# Altium PCB PCB3_factory.PcbDoc (part 2 of 3)
Units mil, origin at the board's own origin, x right, y up, seen from the top; angles counter-clockwise.
Board outline 1614.17 x 4094.49 mil, 2 copper layers (Top Layer, Bottom Layer); 17 components, 26 nets, 94 pads, 20 vias.
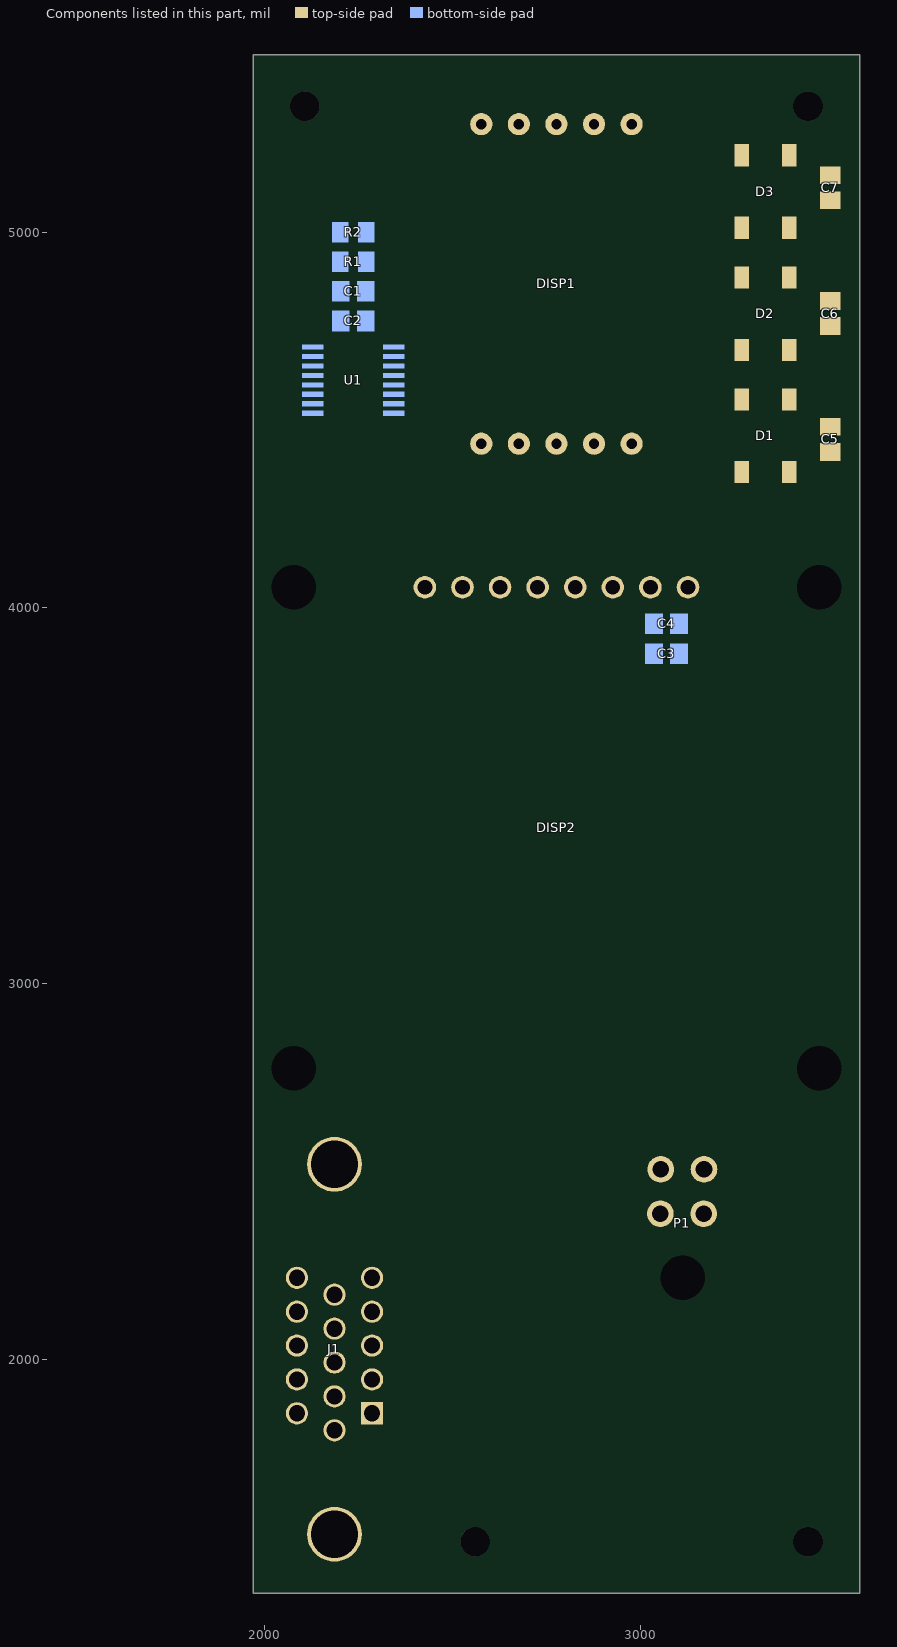
[diagram p2: the components of this part, seen from the top]

## Via types
v1: diameter 35.43/35.43 (per signal layer), hole 11.81, Top Layer to Bottom Layer, tented both sides, 20 vias

## Nets (pads, with @x,y where several pads share a name; then routed paths per layer and width w, separated by ;. In a path a pad name is that pad's centre, name@x,y a point inside that pad or via, vN(x,y) a via of type N, cw(c..) or ccw(c..) an arc to the next point about the centre after c; other vN are vias at no path point) (continued)
copper on no net: (continued)
  Bottom Layer w1: 2719.91,1595.95 3340.91,1595.95 ; 2719.91,1596.95 3340.91,1596.95 ; 2719.91,1597.95 3340.91,1597.95 ; 2719.91,1598.95 3340.91,1598.95 ; 2719.91,1599.95 3340.91,1599.95 ; 2719.91,1600.95 3340.91,1600.95 ; 2719.91,1601.95 3340.91,1601.95 ; 2719.91,1602.95 3340.91,1602.95 ; 2719.91,1603.95 3340.91,1603.95 ; 2719.91,1604.95 3340.91,1604.95 ; 2719.91,1605.95 3340.91,1605.95 ; 2719.91,1606.95 3340.91,1606.95 ; 2719.91,1607.95 3340.91,1607.95 ; 2719.91,1608.95 3340.91,1608.95 ; 2719.91,1609.95 3340.91,1609.95 ; 2719.91,1610.95 3340.91,1610.95 ; 2719.91,1611.95 3340.91,1611.95 ; 2719.91,1612.95 3340.91,1612.95 ; 2719.91,1613.95 3340.91,1613.95 ; 2719.91,1614.95 3340.91,1614.95 ; 2719.91,1615.95 3340.91,1615.95 ; 2719.91,1616.95 3340.91,1616.95 ; 2719.91,1617.95 3340.91,1617.95 ; 2719.91,1618.95 3340.91,1618.95 ; 2719.91,1619.95 3340.91,1619.95 ; 2719.91,1620.95 3340.91,1620.95 ; 2719.91,1621.95 3340.91,1621.95 ; 2719.91,1622.95 3340.91,1622.95 ; 2719.91,1623.95 3340.91,1623.95 ; 2719.91,1624.95 3340.91,1624.95 ; 2719.91,1625.95 3340.91,1625.95 ; 2719.91,1626.95 3340.91,1626.95 ; 2719.91,1627.95 3340.91,1627.95 ; 2719.91,1628.95 3340.91,1628.95 ; 2719.91,1629.95 3340.91,1629.95 ; 2719.91,1630.95 3340.91,1630.95 ; 2719.91,1631.95 3340.91,1631.95 ; 2719.91,1632.95 3340.91,1632.95 ; 2719.91,1633.95 2831.91,1633.95 ; 2719.91,1634.95 2830.91,1634.95 ; 2719.91,1635.95 2829.91,1635.95 ; 2719.91,1636.95 2829.91,1636.95 ; 2719.91,1637.95 2828.91,1637.95 ; 2719.91,1638.95 2828.91,1638.95 ; 2719.91,1639.95 2828.91,1639.95 ; 2719.91,1640.95 2828.91,1640.95 ; 2719.91,1641.95 2828.91,1641.95 ; 2719.91,1642.95 2828.91,1642.95 ; 2719.91,1643.95 2828.91,1643.95 ; 2719.91,1644.95 2829.91,1644.95 ; 2719.91,1645.95 2829.91,1645.95 ; 2719.91,1646.95 2830.91,1646.95 ; 2719.91,1647.95 2830.91,1647.95 ; 2719.91,1648.95 2831.91,1648.95 ; 2719.91,1649.95 2832.91,1649.95 ; 2719.91,1650.95 2842.91,1650.95 ; 2719.91,1651.95 2840.91,1651.95 ; 2719.91,1652.95 2839.91,1652.95 ; 2719.91,1653.95 2838.91,1653.95 ; 2719.91,1654.95 2837.91,1654.95 ; 2719.91,1655.95 2836.91,1655.95 ; 2719.91,1656.95 2835.91,1656.95 ; 2719.91,1657.95 2835.91,1657.95 ; 2719.91,1658.95 2834.91,1658.95 ; 2719.91,1659.95 2834.91,1659.95 ; 2719.91,1660.95 2833.91,1660.95 ; 2719.91,1661.95 2833.91,1661.95 ; 2719.91,1662.95 2833.91,1662.95 ; 2719.91,1663.95 2833.91,1663.95 ; 2719.91,1664.95 2833.91,1664.95 ; 2719.91,1665.95 2833.91,1665.95 ; 2719.91,1666.95 2833.91,1666.95 ; 2719.91,1667.95 2834.91,1667.95 ; 2719.91,1668.95 2834.91,1668.95 ; 2719.91,1669.95 2834.91,1669.95 ; 2719.91,1670.95 2834.91,1670.95 ; 2719.91,1671.95 2835.91,1671.95 ; 2719.91,1672.95 2836.91,1672.95 ; 2719.91,1673.95 2837.91,1673.95 ; 2719.91,1674.95 2840.91,1674.95 ; 2719.91,1675.95 2859.91,1675.95 ; 2719.91,1676.95 2873.91,1676.95 ; 2719.91,1677.95 2874.91,1677.95 ; 2719.91,1678.95 2874.91,1678.95 ; 2719.91,1679.95 2874.91,1679.95 ; 2719.91,1680.95 2874.91,1680.95 ; 2719.91,1681.95 2874.91,1681.95 ; 2719.91,1682.95 2875.91,1682.95 ; 2719.91,1683.95 2875.91,1683.95 ; 2719.91,1684.95 2875.91,1684.95 ; 2719.91,1685.95 2876.91,1685.95 ; 2719.91,1686.95 2876.91,1686.95 ; 2719.91,1687.95 2876.91,1687.95 ; 2719.91,1688.95 2877.91,1688.95 ; 2719.91,1689.95 2877.91,1689.95 ; 2719.91,1690.95 2878.91,1690.95 ; 2719.91,1691.95 2878.91,1691.95 ; 2719.91,1692.95 2879.91,1692.95 ; 2719.91,1693.95 2879.91,1693.95 ; 2719.91,1694.95 2813.91,1694.95 ; 2719.91,1695.95 2803.91,1695.95 ; 2719.91,1696.95 2800.91,1696.95 ; 2719.91,1697.95 2798.91,1697.95 ; 2719.91,1698.95 2796.91,1698.95 ; 2719.91,1699.95 2794.91,1699.95 ; 2719.91,1700.95 2793.91,1700.95 ; 2719.91,1701.95 2792.91,1701.95 ; 2719.91,1702.95 2791.91,1702.95 ; 2719.91,1703.95 2789.91,1703.95 ; 2719.91,1704.95 2788.91,1704.95 ; 2719.91,1705.95 2788.91,1705.95 ; 2719.91,1706.95 2787.91,1706.95 ; 2719.91,1707.95 2786.91,1707.95 ; 2719.91,1708.95 2785.91,1708.95 ; 2719.91,1709.95 2784.91,1709.95 ; 2719.91,1710.95 2783.91,1710.95 ; 2719.91,1711.95 2783.91,1711.95 ; 2719.91,1712.95 2782.91,1712.95 ; 2719.91,1713.95 2781.91,1713.95 ; 2719.91,1714.95 2781.91,1714.95 ; 2719.91,1715.95 2780.91,1715.95 ; 2719.91,1716.95 2780.91,1716.95 ; 2719.91,1717.95 2780.91,1717.95 ; 2719.91,1718.95 2779.91,1718.95 ; 2719.91,1719.95 2779.91,1719.95 ; 2719.91,1720.95 2779.91,1720.95 ; 2719.91,1721.95 2779.91,1721.95 ; 2719.91,1722.95 2779.91,1722.95 ; 2719.91,1723.95 2779.91,1723.95 ; 2719.91,1724.95 2779.91,1724.95 ; 2719.91,1725.95 2779.91,1725.95 ; 2719.91,1726.95 2779.91,1726.95 ; 2719.91,1727.95 2779.91,1727.95 ; 2719.91,1728.95 2779.91,1728.95 ; 2719.91,1729.95 2779.91,1729.95 ; 2719.91,1730.95 2779.91,1730.95 ; 2719.91,1731.95 2779.91,1731.95 ; 2719.91,1732.95 2779.91,1732.95 ; 2719.91,1733.95 2780.91,1733.95 ; 2719.91,1734.95 2780.91,1734.95 ; 2719.91,1735.95 2781.91,1735.95 ; 2719.91,1736.95 2782.91,1736.95 ; 2719.91,1737.95 2783.91,1737.95 ; 2719.91,1738.95 2784.91,1738.95 ; 2719.91,1739.95 2787.91,1739.95 ; 2719.91,1740.95 2794.91,1740.95 ; 2719.91,1741.95 2794.91,1741.95 ; 2719.91,1742.95 2794.91,1742.95 ; 2719.91,1743.95 2794.91,1743.95 ; 2719.91,1744.95 2794.91,1744.95 ; 2719.91,1745.95 2794.91,1745.95 ; 2719.91,1746.95 2794.91,1746.95 ; 2719.91,1747.95 2794.91,1747.95 ; 2719.91,1748.95 2794.91,1748.95 ; 2719.91,1749.95 2794.91,1749.95 ; 2719.91,1750.95 2794.91,1750.95 ; 2719.91,1751.95 2794.91,1751.95 ; 2719.91,1752.95 2794.91,1752.95 ; 2719.91,1753.95 2794.91,1753.95 ; 2719.91,1754.95 2795.91,1754.95 ; 2719.91,1755.95 2795.91,1755.95 ; 2719.91,1756.95 2796.91,1756.95 ; 2719.91,1757.95 2797.91,1757.95 ; 2719.91,1758.95 2799.91,1758.95 ; 2719.91,1759.95 2836.91,1759.95 ; 2719.91,1760.95 2837.91,1760.95 ; 2719.91,1761.95 2838.91,1761.95 ; 2719.91,1762.95 2839.91,1762.95 ; 2719.91,1763.95 2840.91,1763.95 ; 2719.91,1764.95 2841.91,1764.95 ; 2719.91,1765.95 2843.91,1765.95 ; 2719.91,1766.95 2844.91,1766.95 ; 2719.91,1767.95 2845.91,1767.95 ; 2719.91,1768.95 2846.91,1768.95 ; 2719.91,1769.95 2848.91,1769.95 ; 2719.91,1770.95 2849.91,1770.95 ; 2719.91,1771.95 2851.91,1771.95 ; 2719.91,1772.95 2852.91,1772.95 ; 2719.91,1773.95 2847.91,1773.95 ; 2719.91,1774.95 2847.91,1774.95 ; 2719.91,1775.95 2846.91,1775.95 ; 2719.91,1776.95 2846.91,1776.95 ; 2719.91,1777.95 2846.91,1777.95 ; 2719.91,1778.95 2846.91,1778.95 ; 2719.91,1779.95 2845.91,1779.95 ; 2719.91,1780.95 2845.91,1780.95 ; 2719.91,1781.95 2845.91,1781.95 ; 2719.91,1782.95 2845.91,1782.95 ; 2719.91,1783.95 2844.91,1783.95 ; 2719.91,1784.95 2844.91,1784.95 ; 2719.91,1785.95 2844.91,1785.95 ; 2719.91,1786.95 2843.91,1786.95 ; 2719.91,1787.95 2843.91,1787.95 ; 2719.91,1788.95 2842.91,1788.95 ; 2719.91,1789.95 2842.91,1789.95 ; 2719.91,1790.95 2841.91,1790.95 ; 2719.91,1791.95 2841.91,1791.95 ; 2719.91,1792.95 2840.91,1792.95 ; 2719.91,1793.95 2840.91,1793.95 ; 2719.91,1794.95 2839.91,1794.95 ; 2719.91,1795.95 2839.91,1795.95 ; 2719.91,1796.95 2838.91,1796.95 ; 2719.91,1797.95 2838.91,1797.95 ; 2719.91,1798.95 2837.91,1798.95 ; 2719.91,1799.95 2837.91,1799.95 ; 2719.91,1800.95 2836.91,1800.95 ; 2719.91,1801.95 2835.91,1801.95 ; 2719.91,1802.95 2834.91,1802.95 ; 2719.91,1803.95 2833.91,1803.95 ; 2719.91,1804.95 2831.91,1804.95 ; 2719.91,1805.95 2827.91,1805.95 ; 2719.91,1806.95 2824.91,1806.95 ; 2719.91,1807.95 2820.91,1807.95 ; 2719.91,1808.95 2816.91,1808.95 ; 2719.91,1809.95 2812.91,1809.95 ; 2719.91,1810.95 2808.91,1810.95 ; 2719.91,1811.95 2802.91,1811.95 ; 2719.91,1812.95 2796.91,1812.95 ; 2719.91,1813.95 2790.91,1813.95 ; 2719.91,1814.95 2755.91,1814.95 ; 2719.91,1815.95 2755.91,1815.95 ; 2719.91,1816.95 2759.91,1816.95 ; 2719.91,1817.95 2767.91,1817.95 ; 2719.91,1818.95 2878.91,1818.95 ; 2719.91,1819.95 2878.91,1819.95 ; 2719.91,1820.95 2878.91,1820.95 ; 2719.91,1821.95 2878.91,1821.95 ; 2719.91,1822.95 2878.91,1822.95 ; 2719.91,1823.95 2878.91,1823.95 ; 2719.91,1824.95 2878.91,1824.95 ; 2719.91,1825.95 2878.91,1825.95 ; 2719.91,1826.95 2879.91,1826.95 ; 2719.91,1827.95 2879.91,1827.95 ; 2719.91,1828.95 2879.91,1828.95 ; 2719.91,1829.95 2879.91,1829.95 ; 2719.91,1830.95 2879.91,1830.95 ; 2719.91,1831.95 2879.91,1831.95 ; 2719.91,1832.95 2879.91,1832.95 ; 2719.91,1833.95 2879.91,1833.95 ; 2719.91,1834.95 2879.91,1834.95 ; 2719.91,1835.95 2873.91,1835.95 ; 2719.91,1836.95 2870.91,1836.95 ; 2719.91,1837.95 2868.91,1837.95 ; 2719.91,1838.95 2865.91,1838.95 ; 2719.91,1839.95 2863.91,1839.95 ; 2719.91,1840.95 2860.91,1840.95 ; 2719.91,1841.95 2858.91,1841.95 ; 2719.91,1842.95 2856.91,1842.95 ; 2719.91,1843.95 2853.91,1843.95 ; 2719.91,1844.95 2851.91,1844.95 ; 2719.91,1845.95 2849.91,1845.95 ; 2719.91,1846.95 2847.91,1846.95 ; 2719.91,1847.95 2845.91,1847.95 ; 2719.91,1848.95 2842.91,1848.95 ; 2719.91,1849.95 2840.91,1849.95 ; 2719.91,1850.95 2838.91,1850.95 ; 2719.91,1851.95 2836.91,1851.95 ; 2719.91,1852.95 2834.91,1852.95 ; 2719.91,1853.95 2831.91,1853.95 ; 2719.91,1854.95 2829.91,1854.95 ; 2719.91,1855.95 2827.91,1855.95 ; 2719.91,1856.95 2825.91,1856.95 ; 2719.91,1857.95 2823.91,1857.95 ; 2719.91,1858.95 2821.91,1858.95 ; 2719.91,1859.95 2819.91,1859.95 ; 2719.91,1860.95 2817.91,1860.95 ; 2719.91,1861.95 2815.91,1861.95 ; 2719.91,1862.95 2813.91,1862.95 ; 2719.91,1863.95 2811.91,1863.95 ; 2719.91,1864.95 2810.91,1864.95 ; 2719.91,1865.95 2808.91,1865.95 ; 2719.91,1866.95 2806.91,1866.95 ; 2719.91,1867.95 2804.91,1867.95 ; 2719.91,1868.95 2803.91,1868.95 ; 2719.91,1869.95 2801.91,1869.95 ; 2719.91,1870.95 2799.91,1870.95 ; 2719.91,1871.95 2798.91,1871.95 ; 2719.91,1872.95 2796.91,1872.95 ; 2719.91,1873.95 2795.91,1873.95 ; 2719.91,1874.95 2793.91,1874.95 ; 2719.91,1875.95 2791.91,1875.95 ; 2719.91,1876.95 2790.91,1876.95 ; 2719.91,1877.95 2788.91,1877.95 ; 2719.91,1878.95 2787.91,1878.95 ; 2719.91,1879.95 2785.91,1879.95 ; 2719.91,1880.95 2783.91,1880.95 ; 2719.91,1881.95 2782.91,1881.95 ; 2719.91,1882.95 2780.91,1882.95 ; 2719.91,1883.95 2779.91,1883.95 ; 2719.91,1884.95 2777.91,1884.95 ; 2719.91,1885.95 2776.91,1885.95 ; 2719.91,1886.95 2774.91,1886.95 ; 2719.91,1887.95 2773.91,1887.95 ; 2719.91,1888.95 2771.91,1888.95 ; 2719.91,1889.95 2770.91,1889.95 ; 2719.91,1890.95 2768.91,1890.95 ; 2719.91,1891.95 2767.91,1891.95 ; 2719.91,1892.95 2765.91,1892.95 ; 2719.91,1893.95 2764.91,1893.95 ; 2719.91,1894.95 2762.91,1894.95 ; 2719.91,1895.95 2761.91,1895.95 ; 2719.91,1896.95 2760.91,1896.95 ; 2719.91,1897.95 2758.91,1897.95 ; 2719.91,1898.95 2757.91,1898.95 ; 2719.91,1899.95 2756.91,1899.95 ; 2719.91,1900.95 2754.91,1900.95 ; 2719.91,1901.95 2753.91,1901.95 ; 2719.91,1902.95 2752.91,1902.95 ; 2719.91,1903.95 2751.91,1903.95 ; 2719.91,1904.95 2750.91,1904.95 ; 2719.91,1905.95 2749.91,1905.95 ; 2719.91,1906.95 2747.91,1906.95 ; 2719.91,1907.95 2746.91,1907.95 ; 2719.91,1908.95 2745.91,1908.95 ; 2719.91,1909.95 2745.91,1909.95 ; 2719.91,1910.95 2745.91,1910.95 ; 2719.91,1911.95 3340.91,1911.95 ; 2719.91,1912.95 3340.91,1912.95 ; 2719.91,1913.95 3340.91,1913.95 ; 2719.91,1914.95 3340.91,1914.95 ; 2719.91,1915.95 3340.91,1915.95 ; 2719.91,1916.95 3340.91,1916.95 ; 2719.91,1917.95 3340.91,1917.95 ; 2719.91,1918.95 3340.91,1918.95 ; 2719.91,1919.95 3340.91,1919.95 ; 2719.91,1920.95 3340.91,1920.95 ; 2719.91,1921.95 3340.91,1921.95 ; 2719.91,1922.95 3340.91,1922.95 ; 2719.91,1923.95 3340.91,1923.95 ; 2719.91,1924.95 3340.91,1924.95 ; 2719.91,1925.95 3340.91,1925.95 ; 2719.91,1926.95 3340.91,1926.95 ; 2719.91,1927.95 3340.91,1927.95 ; 2719.91,1928.95 3340.91,1928.95 ; 2719.91,1929.95 3340.91,1929.95 ; 2719.91,1930.95 3340.91,1930.95 ; 2719.91,1931.95 3340.91,1931.95 ; 2719.91,1932.95 3340.91,1932.95 ; 2746.91,1910.95 3340.91,1910.95 ; 2748.91,1909.95 3340.91,1909.95 ; 2749.91,1908.95 3340.91,1908.95 ; 2751.91,1907.95 3340.91,1907.95 ; 2752.91,1906.95 3340.91,1906.95 ; 2754.91,1905.95 3340.91,1905.95 ; 2756.91,1904.95 3340.91,1904.95 ; 2757.91,1903.95 3340.91,1903.95 ; 2759.91,1902.95 3340.91,1902.95 ; 2760.91,1901.95 3340.91,1901.95 ; 2762.91,1900.95 3340.91,1900.95 ; 2763.91,1899.95 3340.91,1899.95 ; 2765.91,1814.95 2780.91,1814.95 ; 2765.91,1898.95 3340.91,1898.95 ; 2766.91,1897.95 2779.91,1897.95 ; 2768.91,1896.95 2779.91,1896.95 ; 2769.91,1895.95 2779.91,1895.95 ; 2771.91,1894.95 2781.91,1894.95 ; 2772.91,1893.95 2783.91,1893.95 ; 2774.91,1892.95 2784.91,1892.95 ; 2776.91,1891.95 2786.91,1891.95 ; 2777.91,1890.95 2787.91,1890.95 ; 2779.91,1889.95 2789.91,1889.95 ; 2780.91,1897.95 3340.91,1897.95 ; 2781.91,1888.95 2791.91,1888.95 ; 2782.91,1887.95 2792.91,1887.95 ; 2782.91,1896.95 3340.91,1896.95 ; 2784.91,1886.95 2794.91,1886.95 ; 2784.91,1895.95 3340.91,1895.95 ; 2786.91,1885.95 2796.91,1885.95 ; 2787.91,1884.95 2798.91,1884.95 ; 2787.91,1894.95 3340.91,1894.95 ; 2789.91,1739.95 2794.91,1739.95 ; 2789.91,1883.95 2800.91,1883.95 ; 2789.91,1893.95 3340.91,1893.95 ; 2790.91,1715.95 2793.91,1715.95 ; 2790.91,1716.95 2792.91,1716.95 ; 2790.91,1717.95 2792.91,1717.95 ; 2790.91,1718.95 2792.91,1718.95 ; 2790.91,1719.95 2792.91,1719.95 ; 2790.91,1720.95 2792.91,1720.95 ; 2790.91,1721.95 2792.91,1721.95 ; 2790.91,1722.95 2792.91,1722.95 ; 2790.91,1723.95 2797.91,1723.95 ; 2790.91,1724.95 2797.91,1724.95 ; 2791.91,1713.95 2793.91,1713.95 ; 2791.91,1714.95 2793.91,1714.95 ; 2791.91,1817.95 2878.91,1817.95 ; 2791.91,1882.95 2802.91,1882.95 ; 2791.91,1892.95 3340.91,1892.95 ; 2792.91,1711.95 2794.91,1711.95 ; 2792.91,1712.95 2794.91,1712.95 ; 2792.91,1735.95 2794.91,1735.95 ; 2792.91,1736.95 2794.91,1736.95 ; 2792.91,1737.95 2794.91,1737.95 ; 2792.91,1738.95 2794.91,1738.95 ; 2792.91,1881.95 2804.91,1881.95 ; 2793.91,1709.95 2796.91,1709.95 ; 2793.91,1710.95 2795.91,1710.95 ; 2793.91,1722.95 2798.91,1722.95 ; 2793.91,1730.95 2795.91,1730.95 ; 2793.91,1731.95 2795.91,1731.95 ; 2793.91,1732.95 2795.91,1732.95 ; 2793.91,1733.95 2795.91,1733.95 ; 2793.91,1734.95 2794.91,1734.95 ; 2793.91,1891.95 3340.91,1891.95 ; 2794.91,1708.95 2796.91,1708.95 ; 2794.91,1725.95 2796.91,1725.95 ; 2794.91,1726.95 2796.91,1726.95 ; 2794.91,1727.95 2796.91,1727.95 ; 2794.91,1728.95 2795.91,1728.95 ; 2794.91,1729.95 2795.91,1729.95 ; 2794.91,1880.95 2806.91,1880.95 ; 2795.91,1707.95 2797.91,1707.95 ; 2795.91,1721.95 2798.91,1721.95 ; 2795.91,1890.95 3340.91,1890.95 ; 2796.91,1705.95 2799.91,1705.95 ; 2796.91,1706.95 2798.91,1706.95 ; 2796.91,1720.95 2799.91,1720.95 ; 2796.91,1879.95 2807.91,1879.95 ; 2797.91,1704.95 2799.91,1704.95 ; 2797.91,1719.95 2799.91,1719.95 ; 2797.91,1878.95 2809.91,1878.95 ; 2797.91,1889.95 3340.91,1889.95 ; 2798.91,1703.95 2800.91,1703.95 ; 2798.91,1717.95 2801.91,1717.95 ; 2798.91,1718.95 2800.91,1718.95 ; 2799.91,1702.95 2801.91,1702.95 ; 2799.91,1716.95 2801.91,1716.95 ; 2799.91,1816.95 2826.91,1816.95 ; 2799.91,1877.95 2811.91,1877.95 ; 2799.91,1888.95 3340.91,1888.95 ; 2800.91,1701.95 2802.91,1701.95 ; 2800.91,1715.95 2802.91,1715.95 ; 2801.91,1699.95 2804.91,1699.95 ; 2801.91,1700.95 2803.91,1700.95 ; 2801.91,1713.95 2804.91,1713.95 ; 2801.91,1714.95 2803.91,1714.95 ; 2801.91,1876.95 2813.91,1876.95 ; 2801.91,1887.95 3340.91,1887.95 ; 2802.91,1698.95 2806.91,1698.95 ; 2802.91,1712.95 2809.91,1712.95 ; 2802.91,1875.95 2815.91,1875.95 ; 2803.91,1697.95 2807.91,1697.95 ; 2803.91,1711.95 2809.91,1711.95 ; 2803.91,1886.95 3340.91,1886.95 ; 2804.91,1695.95 2810.91,1695.95 ; 2804.91,1696.95 2809.91,1696.95 ; 2804.91,1710.95 2809.91,1710.95 ; 2804.91,1725.95 2806.91,1725.95 ; 2804.91,1726.95 2806.91,1726.95 ; 2804.91,1727.95 2806.91,1727.95 ; 2804.91,1728.95 2806.91,1728.95 ; 2804.91,1729.95 2806.91,1729.95 ; 2804.91,1730.95 2806.91,1730.95 ; 2804.91,1731.95 2805.91,1731.95 ; 2804.91,1732.95 2805.91,1732.95 ; 2804.91,1733.95 2805.91,1733.95 ; 2804.91,1734.95 2805.91,1734.95 ; 2804.91,1735.95 2806.91,1735.95 ; 2804.91,1736.95 2806.91,1736.95 ; 2804.91,1737.95 2807.91,1737.95 ; 2804.91,1874.95 2817.91,1874.95 ; 2805.91,1709.95 2809.91,1709.95 ; 2805.91,1719.95 2807.91,1719.95 ; 2805.91,1720.95 2807.91,1720.95 ; 2805.91,1721.95 2807.91,1721.95 ; 2805.91,1722.95 2806.91,1722.95 ; 2805.91,1723.95 2806.91,1723.95 ; 2805.91,1724.95 2806.91,1724.95 ; 2805.91,1738.95 2807.91,1738.95 ; 2805.91,1758.95 2816.91,1758.95 ; 2805.91,1885.95 3340.91,1885.95 ; 2806.91,1713.95 2808.91,1713.95 ; 2806.91,1714.95 2808.91,1714.95 ; 2806.91,1715.95 2808.91,1715.95 ; 2806.91,1716.95 2808.91,1716.95 ; 2806.91,1717.95 2808.91,1717.95 ; 2806.91,1718.95 2807.91,1718.95 ; 2806.91,1815.95 2826.91,1815.95 ; 2806.91,1873.95 2819.91,1873.95 ; 2807.91,1708.95 2810.91,1708.95 ; 2807.91,1757.95 2814.91,1757.95 ; 2807.91,1872.95 2821.91,1872.95 ; 2807.91,1884.95 3340.91,1884.95 ; 2808.91,1756.95 2813.91,1756.95 ; 2809.91,1707.95 2810.91,1707.95 ; 2809.91,1755.95 2813.91,1755.95 ; 2809.91,1871.95 2824.91,1871.95 ; 2809.91,1883.95 3340.91,1883.95 ; 2810.91,1751.95 2813.91,1751.95 ; 2810.91,1752.95 2813.91,1752.95 ; 2810.91,1753.95 2813.91,1753.95 ; 2810.91,1754.95 2813.91,1754.95 ; 2811.91,1741.95 2813.91,1741.95 ; 2811.91,1742.95 2813.91,1742.95 ; 2811.91,1743.95 2813.91,1743.95 ; 2811.91,1744.95 2813.91,1744.95 ; 2811.91,1745.95 2813.91,1745.95 ; 2811.91,1746.95 2813.91,1746.95 ; 2811.91,1747.95 2813.91,1747.95 ; 2811.91,1748.95 2813.91,1748.95 ; 2811.91,1749.95 2813.91,1749.95 ; 2811.91,1750.95 2813.91,1750.95 ; 2811.91,1814.95 2826.91,1814.95 ; 2811.91,1870.95 2826.91,1870.95 ; 2811.91,1882.95 3340.91,1882.95 ; 2812.91,1735.95 2814.91,1735.95 ; 2812.91,1736.95 2814.91,1736.95 ; 2812.91,1737.95 2814.91,1737.95 ; 2812.91,1738.95 2814.91,1738.95 ; 2812.91,1739.95 2814.91,1739.95 ; 2812.91,1740.95 2814.91,1740.95 ; 2813.91,1730.95 2815.91,1730.95 ; 2813.91,1731.95 2815.91,1731.95 ; 2813.91,1732.95 2815.91,1732.95 ; 2813.91,1733.95 2815.91,1733.95 ; 2813.91,1734.95 2814.91,1734.95 ; 2813.91,1869.95 2828.91,1869.95 ; 2813.91,1881.95 3340.91,1881.95 ; 2814.91,1725.95 2816.91,1725.95 ; 2814.91,1726.95 2816.91,1726.95 ; 2814.91,1727.95 2816.91,1727.95 ; 2814.91,1728.95 2816.91,1728.95 ; 2814.91,1729.95 2815.91,1729.95 ; 2815.91,1722.95 2817.91,1722.95 ; 2815.91,1723.95 2817.91,1723.95 ; 2815.91,1724.95 2817.91,1724.95 ; 2815.91,1813.95 2826.91,1813.95 ; 2815.91,1868.95 2830.91,1868.95 ; 2816.91,1719.95 2818.91,1719.95 ; 2816.91,1720.95 2818.91,1720.95 ; 2816.91,1721.95 2818.91,1721.95 ; 2816.91,1880.95 3340.91,1880.95 ; 2817.91,1717.95 2819.91,1717.95 ; 2817.91,1718.95 2819.91,1718.95 ; 2817.91,1867.95 2832.91,1867.95 ; 2818.91,1715.95 2820.91,1715.95 ; 2818.91,1716.95 2820.91,1716.95 ; 2818.91,1812.95 2827.91,1812.95 ; 2818.91,1879.95 3340.91,1879.95 ; 2819.91,1713.95 2825.91,1713.95 ; 2819.91,1714.95 2821.91,1714.95 ; 2819.91,1866.95 2835.91,1866.95 ; 2820.91,1712.95 2826.91,1712.95 ; 2820.91,1878.95 3340.91,1878.95 ; 2821.91,1711.95 2826.91,1711.95 ; 2821.91,1865.95 2837.91,1865.95 ; 2822.91,1694.95 2879.91,1694.95 ; 2822.91,1710.95 2827.91,1710.95 ; 2822.91,1719.95 2824.91,1719.95 ; 2822.91,1720.95 2824.91,1720.95 ; 2822.91,1721.95 2824.91,1721.95 ; 2822.91,1722.95 2824.91,1722.95 ; 2822.91,1723.95 2824.91,1723.95 ; 2822.91,1724.95 2824.91,1724.95 ; 2822.91,1725.95 2824.91,1725.95 ; 2822.91,1726.95 2824.91,1726.95 ; 2822.91,1727.95 2824.91,1727.95 ; 2822.91,1728.95 2824.91,1728.95 ; 2822.91,1729.95 2825.91,1729.95 ; 2822.91,1811.95 2828.91,1811.95 ; 2822.91,1877.95 3340.91,1877.95 ; 2823.91,1709.95 2882.91,1709.95 ; 2823.91,1714.95 2825.91,1714.95 ; 2823.91,1715.95 2825.91,1715.95 ; 2823.91,1716.95 2825.91,1716.95 ; 2823.91,1717.95 2824.91,1717.95 ; 2823.91,1718.95 2824.91,1718.95 ; 2823.91,1730.95 2825.91,1730.95 ; 2823.91,1731.95 2825.91,1731.95 ; 2823.91,1864.95 2839.91,1864.95 ; 2824.91,1695.95 2880.91,1695.95 ; 2824.91,1708.95 2882.91,1708.95 ; 2824.91,1732.95 2826.91,1732.95 ; 2824.91,1733.95 2826.91,1733.95 ; 2824.91,1738.95 2827.91,1738.95 ; 2824.91,1739.95 2827.91,1739.95 ; 2824.91,1740.95 2826.91,1740.95 ; 2824.91,1758.95 2835.91,1758.95 ; 2825.91,1696.95 2880.91,1696.95 ; 2825.91,1707.95 2882.91,1707.95 ; 2825.91,1734.95 2826.91,1734.95 ; 2825.91,1735.95 2827.91,1735.95 ; 2825.91,1736.95 2827.91,1736.95 ; 2825.91,1737.95 2827.91,1737.95 ; 2825.91,1757.95 2833.91,1757.95 ; 2825.91,1863.95 2842.91,1863.95 ; 2825.91,1876.95 3340.91,1876.95 ; 2826.91,1697.95 2880.91,1697.95 ; 2826.91,1706.95 2882.91,1706.95 ; 2826.91,1755.95 2829.91,1755.95 ; 2826.91,1756.95 2832.91,1756.95 ; 2826.91,1810.95 2829.91,1810.95 ; 2827.91,1698.95 2881.91,1698.95 ; 2827.91,1699.95 2881.91,1699.95 ; 2827.91,1700.95 2881.91,1700.95 ; 2827.91,1705.95 2882.91,1705.95 ; 2827.91,1862.95 2844.91,1862.95 ; 2827.91,1875.95 3340.91,1875.95 ; 2828.91,1701.95 2881.91,1701.95 ; 2828.91,1702.95 2882.91,1702.95 ; 2828.91,1703.95 2882.91,1703.95 ; 2828.91,1704.95 2882.91,1704.95 ; 2828.91,1710.95 2882.91,1710.95 ; 2828.91,1711.95 2881.91,1711.95 ; 2828.91,1712.95 2881.91,1712.95 ; 2828.91,1713.95 2880.91,1713.95 ; 2829.91,1714.95 2879.91,1714.95 ; 2829.91,1715.95 2876.91,1715.95 ; 2829.91,1716.95 2872.91,1716.95 ; 2829.91,1717.95 2868.91,1717.95 ; 2829.91,1718.95 2866.91,1718.95 ; 2829.91,1861.95 2847.91,1861.95 ; 2829.91,1874.95 3340.91,1874.95 ; 2830.91,1719.95 2865.91,1719.95 ; 2830.91,1720.95 2865.91,1720.95 ; 2830.91,1721.95 2864.91,1721.95 ; 2830.91,1816.95 2878.91,1816.95 ; 2831.91,1722.95 2864.91,1722.95 ; 2831.91,1815.95 2878.91,1815.95 ; 2831.91,1860.95 2849.91,1860.95 ; 2831.91,1873.95 3112.91,1873.95 ; 2832.91,1723.95 2864.91,1723.95 ; 2832.91,1814.95 2878.91,1814.95 ; 2833.91,1642.95 2842.91,1642.95 ; 2833.91,1643.95 2844.91,1643.95 ; 2833.91,1724.95 2863.91,1724.95 ; 2833.91,1813.95 2878.91,1813.95 ; 2833.91,1859.95 2852.91,1859.95 ; 2834.91,1640.95 2839.91,1640.95 ; 2834.91,1641.95 2841.91,1641.95 ; 2834.91,1644.95 2845.91,1644.95 ; 2834.91,1645.95 2847.91,1645.95 ; 2834.91,1646.95 2848.91,1646.95 ; 2834.91,1647.95 2849.91,1647.95 ; 2834.91,1648.95 2847.91,1648.95 ; 2834.91,1649.95 2844.91,1649.95 ; 2834.91,1811.95 2879.91,1811.95 ; 2834.91,1812.95 2879.91,1812.95 ; 2834.91,1872.95 3101.91,1872.95 ; 2835.91,1639.95 2837.91,1639.95 ; 2835.91,1810.95 2878.91,1810.95 ; 2835.91,1858.95 2855.91,1858.95 ; 2836.91,1725.95 2863.91,1725.95 ; 2836.91,1808.95 2877.91,1808.95 ; 2836.91,1809.95 2878.91,1809.95 ; 2836.91,1871.95 3092.91,1871.95 ; 2837.91,1726.95 2863.91,1726.95 ; 2837.91,1807.95 2877.91,1807.95 ; 2838.91,1727.95 2863.91,1727.95 ; 2838.91,1805.95 2876.91,1805.95 ; 2838.91,1806.95 2877.91,1806.95 ; 2838.91,1857.95 2858.91,1857.95 ; 2839.91,1664.95 2852.91,1664.95 ; 2839.91,1665.95 2852.91,1665.95 ; 2839.91,1666.95 2852.91,1666.95 ; 2839.91,1667.95 2852.91,1667.95 ; 2839.91,1728.95 2862.91,1728.95 ; 2839.91,1729.95 2862.91,1729.95 ; 2839.91,1804.95 2876.91,1804.95 ; 2839.91,1870.95 3084.91,1870.95 ; 2840.91,1633.95 3340.91,1633.95 ; 2840.91,1662.95 2853.91,1662.95 ; 2840.91,1663.95 2853.91,1663.95 ; 2840.91,1668.95 2852.91,1668.95 ; 2840.91,1669.95 2853.91,1669.95 ; 2840.91,1730.95 2862.91,1730.95 ; 2840.91,1802.95 2875.91,1802.95 ; 2840.91,1803.95 2876.91,1803.95 ; 2840.91,1856.95 2861.91,1856.95 ; 2841.91,1660.95 2854.91,1660.95 ; 2841.91,1661.95 2853.91,1661.95 ; 2841.91,1670.95 2853.91,1670.95 ; 2841.91,1671.95 2853.91,1671.95 ; 2841.91,1800.95 2875.91,1800.95 ; 2841.91,1801.95 2875.91,1801.95 ; 2841.91,1869.95 3076.91,1869.95 ; 2842.91,1672.95 2854.91,1672.95 ; 2842.91,1731.95 2862.91,1731.95 ; 2842.91,1798.95 2875.91,1798.95 ; 2842.91,1799.95 2875.91,1799.95 ; 2842.91,1855.95 2865.91,1855.95 ; 2843.91,1634.95 3340.91,1634.95 ; 2843.91,1673.95 2855.91,1673.95 ; 2843.91,1674.95 2857.91,1674.95 ; 2843.91,1796.95 2875.91,1796.95 ; 2843.91,1797.95 2875.91,1797.95 ; 2844.91,1795.95 2872.91,1795.95 ; 2844.91,1868.95 3068.91,1868.95 ; 2845.91,1793.95 2869.91,1793.95 ; 2845.91,1794.95 2870.91,1794.95 ; 2845.91,1854.95 2868.91,1854.95 ; 2846.91,1635.95 3340.91,1635.95 ; 2846.91,1732.95 2862.91,1732.95 ; 2846.91,1791.95 2867.91,1791.95 ; 2846.91,1792.95 2868.91,1792.95 ; 2847.91,1788.95 2865.91,1788.95 ; 2847.91,1789.95 2866.91,1789.95 ; 2847.91,1790.95 2867.91,1790.95 ; 2847.91,1853.95 2872.91,1853.95 ; 2847.91,1867.95 3060.91,1867.95 ; 2848.91,1636.95 3340.91,1636.95 ; 2848.91,1786.95 2864.91,1786.95 ; 2848.91,1787.95 2865.91,1787.95 ; 2849.91,1733.95 2862.91,1733.95 ; 2849.91,1784.95 2863.91,1784.95 ; 2849.91,1785.95 2864.91,1785.95 ; 2849.91,1852.95 2876.91,1852.95 ; 2850.91,1637.95 3340.91,1637.95 ; 2850.91,1781.95 2862.91,1781.95 ; 2850.91,1782.95 2862.91,1782.95 ; 2850.91,1783.95 2863.91,1783.95 ; 2850.91,1866.95 3054.91,1866.95 ; 2851.91,1638.95 3046.91,1638.95 ; 2851.91,1773.95 2854.91,1773.95 ; 2851.91,1778.95 2860.91,1778.95 ; 2851.91,1779.95 2861.91,1779.95 ; 2851.91,1780.95 2861.91,1780.95 ; 2852.91,1734.95 2861.91,1734.95 ; 2852.91,1774.95 2855.91,1774.95 ; 2852.91,1775.95 2857.91,1775.95 ; 2852.91,1776.95 2858.91,1776.95 ; 2852.91,1777.95 2859.91,1777.95 ; 2852.91,1851.95 2874.91,1851.95 ; 2853.91,1639.95 3043.91,1639.95 ; 2853.91,1735.95 2861.91,1735.95 ; 2853.91,1865.95 3048.91,1865.95 ; 2854.91,1640.95 3041.91,1640.95 ; 2855.91,1641.95 3040.91,1641.95 ; 2855.91,1736.95 2861.91,1736.95 ; 2855.91,1850.95 2873.91,1850.95 ; 2856.91,1737.95 2861.91,1737.95 ; 2856.91,1864.95 3042.91,1864.95 ; 2857.91,1642.95 3039.91,1642.95 ; 2857.91,1738.95 2861.91,1738.95 ; 2857.91,1849.95 2873.91,1849.95 ; 2858.91,1643.95 3038.91,1643.95 ; 2858.91,1667.95 2870.91,1667.95 ; 2858.91,1668.95 2871.91,1668.95 ; 2858.91,1669.95 2871.91,1669.95 ; 2858.91,1739.95 2861.91,1739.95 ; 2859.91,1665.95 2868.91,1665.95 ; 2859.91,1666.95 2869.91,1666.95 ; 2859.91,1670.95 2872.91,1670.95 ; 2859.91,1671.95 2872.91,1671.95 ; 2859.91,1863.95 3036.91,1863.95 ; 2860.91,1644.95 3037.91,1644.95 ; 2860.91,1664.95 2867.91,1664.95 ; 2860.91,1672.95 2872.91,1672.95 ; 2860.91,1673.95 2873.91,1673.95 ; 2860.91,1740.95 2875.91,1740.95 ; 2860.91,1848.95 2873.91,1848.95 ; 2861.91,1663.95 2866.91,1663.95 ; 2861.91,1674.95 2873.91,1674.95 ; 2861.91,1675.95 2873.91,1675.95 ; 2861.91,1741.95 2878.91,1741.95 ; 2862.91,1645.95 3036.91,1645.95 ; 2862.91,1662.95 2865.91,1662.95 ; 2863.91,1847.95 2873.91,1847.95 ; 2863.91,1862.95 3031.91,1862.95 ; 2864.91,1646.95 3036.91,1646.95 ; 2866.91,1846.95 2876.91,1846.95 ; 2867.91,1647.95 3036.91,1647.95 ; 2867.91,1861.95 3026.91,1861.95 ; 2869.91,1845.95 2888.91,1845.95 ; 2870.91,1648.95 3035.91,1648.95 ; 2870.91,1860.95 3021.91,1860.95 ; 2873.91,1649.95 3035.91,1649.95 ; 2873.91,1742.95 2881.91,1742.95 ; 2873.91,1792.95 2875.91,1792.95 ; 2873.91,1793.95 2875.91,1793.95 ; 2873.91,1794.95 2875.91,1794.95 ; 2873.91,1795.95 2875.91,1795.95 ; 2873.91,1844.95 2888.91,1844.95 ; 2874.91,1788.95 2876.91,1788.95 ; 2874.91,1789.95 2876.91,1789.95 ; 2874.91,1790.95 2875.91,1790.95 ; 2874.91,1791.95 2875.91,1791.95 ; 2874.91,1859.95 3016.91,1859.95 ; 2875.91,1785.95 2877.91,1785.95 ; 2875.91,1786.95 2877.91,1786.95 ; 2875.91,1787.95 2876.91,1787.95 ; 2875.91,1842.95 2876.91,1842.95 ; 2875.91,1843.95 2876.91,1843.95 ; 2875.91,1847.95 2876.91,1847.95 ; 2876.91,1650.95 3035.91,1650.95 ; 2876.91,1783.95 2878.91,1783.95 ; 2876.91,1784.95 2877.91,1784.95 ; 2876.91,1839.95 2877.91,1839.95 ; 2876.91,1840.95 2877.91,1840.95 ; 2876.91,1841.95 2877.91,1841.95 ; 2876.91,1853.95 2878.91,1853.95 ; 2877.91,1781.95 2879.91,1781.95 ; 2877.91,1782.95 2878.91,1782.95 ; 2877.91,1835.95 2879.91,1835.95 ; 2877.91,1836.95 2879.91,1836.95 ; 2877.91,1837.95 2878.91,1837.95 ; 2877.91,1838.95 2878.91,1838.95 ; 2878.91,1651.95 3035.91,1651.95 ; 2878.91,1743.95 2883.91,1743.95 ; 2878.91,1779.95 2880.91,1779.95 ; 2878.91,1780.95 2879.91,1780.95 ; 2878.91,1843.95 2889.91,1843.95 ; 2878.91,1846.95 2887.91,1846.95 ; 2878.91,1854.95 2880.91,1854.95 ; 2878.91,1858.95 3011.91,1858.95 ; 2879.91,1652.95 3035.91,1652.95 ; 2879.91,1777.95 2881.91,1777.95 ; 2879.91,1778.95 2880.91,1778.95 ; 2879.91,1793.95 2894.91,1793.95 ; 2879.91,1794.95 2899.91,1794.95 ; 2879.91,1795.95 2899.91,1795.95 ; 2879.91,1796.95 2899.91,1796.95 ; 2879.91,1797.95 2899.91,1797.95 ; 2879.91,1798.95 2899.91,1798.95 ; 2879.91,1847.95 2886.91,1847.95 ; 2880.91,1653.95 3035.91,1653.95 ; 2880.91,1654.95 3035.91,1654.95 ; 2880.91,1774.95 2883.91,1774.95 ; 2880.91,1775.95 2882.91,1775.95 ; 2880.91,1776.95 2882.91,1776.95 ; 2880.91,1790.95 2895.91,1790.95 ; 2880.91,1791.95 2894.91,1791.95 ; 2880.91,1792.95 2894.91,1792.95 ; 2880.91,1799.95 2882.91,1799.95 ; 2880.91,1800.95 2881.91,1800.95 ; 2880.91,1801.95 2881.91,1801.95 ; 2880.91,1802.95 2881.91,1802.95 ; 2881.91,1655.95 3035.91,1655.95 ; 2881.91,1744.95 2885.91,1744.95 ; 2881.91,1772.95 2884.91,1772.95 ; 2881.91,1773.95 2883.91,1773.95 ; 2881.91,1787.95 2892.91,1787.95 ; 2881.91,1788.95 2892.91,1788.95 ; 2881.91,1789.95 2896.91,1789.95 ; 2881.91,1841.95 2890.91,1841.95 ; 2881.91,1842.95 2890.91,1842.95 ; 2881.91,1848.95 2886.91,1848.95 ; 2881.91,1857.95 3007.91,1857.95 ; 2882.91,1656.95 2999.91,1656.95 ; 2882.91,1657.95 2998.91,1657.95 ; 2882.91,1771.95 2884.91,1771.95 ; 2882.91,1785.95 2893.91,1785.95 ; 2882.91,1786.95 2892.91,1786.95 ; 2882.91,1839.95 2891.91,1839.95 ; 2882.91,1840.95 2891.91,1840.95 ; 2882.91,1849.95 2884.91,1849.95 ; 2882.91,1855.95 2998.91,1855.95 ; 2882.91,1856.95 3002.91,1856.95 ; 2883.91,1658.95 2997.91,1658.95 ; 2883.91,1745.95 2886.91,1745.95 ; 2883.91,1769.95 2886.91,1769.95 ; 2883.91,1770.95 2885.91,1770.95 ; 2883.91,1782.95 2896.91,1782.95 ; 2883.91,1783.95 2895.91,1783.95 ; 2883.91,1784.95 2894.91,1784.95 ; 2883.91,1819.95 2897.91,1819.95 ; 2883.91,1820.95 2897.91,1820.95 ; 2883.91,1821.95 2897.91,1821.95 ; 2883.91,1822.95 2897.91,1822.95 ; 2883.91,1823.95 2897.91,1823.95 ; 2883.91,1824.95 2897.91,1824.95 ; 2883.91,1825.95 2896.91,1825.95 ; 2883.91,1826.95 2896.91,1826.95 ; 2883.91,1827.95 2896.91,1827.95 ; 2883.91,1837.95 2892.91,1837.95 ; 2883.91,1838.95 2892.91,1838.95 ; 2884.91,1659.95 2996.91,1659.95 ; 2884.91,1660.95 2996.91,1660.95 ; 2884.91,1746.95 2887.91,1746.95 ; 2884.91,1767.95 2887.91,1767.95 ; 2884.91,1768.95 2886.91,1768.95 ; 2884.91,1780.95 2899.91,1780.95 ; 2884.91,1781.95 2897.91,1781.95 ; 2884.91,1809.95 2898.91,1809.95 ; 2884.91,1810.95 2898.91,1810.95 ; 2884.91,1811.95 2897.91,1811.95 ; 2884.91,1812.95 2897.91,1812.95 ; 2884.91,1813.95 2897.91,1813.95 ; 2884.91,1814.95 2897.91,1814.95 ; 2884.91,1815.95 2897.91,1815.95 ; 2884.91,1816.95 2897.91,1816.95 ; 2884.91,1817.95 2897.91,1817.95 ; 2884.91,1818.95 2897.91,1818.95 ; 2884.91,1828.95 2895.91,1828.95 ; 2884.91,1829.95 2895.91,1829.95 ; 2884.91,1830.95 2895.91,1830.95 ; 2884.91,1831.95 2894.91,1831.95 ; 2884.91,1832.95 2894.91,1832.95 ; 2884.91,1833.95 2894.91,1833.95 ; 2884.91,1834.95 2893.91,1834.95 ; 2884.91,1835.95 2893.91,1835.95 ; 2884.91,1836.95 2892.91,1836.95 ; 2885.91,1661.95 2995.91,1661.95 ; 2885.91,1662.95 2994.91,1662.95 ; 2885.91,1765.95 2888.91,1765.95 ; 2885.91,1766.95 2887.91,1766.95 ; 2885.91,1779.95 2900.91,1779.95 ; 2885.91,1799.95 2898.91,1799.95 ; 2885.91,1800.95 2898.91,1800.95 ; 2885.91,1801.95 2898.91,1801.95 ; 2885.91,1802.95 2898.91,1802.95 ; 2885.91,1803.95 2898.91,1803.95 ; 2885.91,1804.95 2898.91,1804.95 ; 2885.91,1805.95 2898.91,1805.95 ; 2885.91,1806.95 2898.91,1806.95 ; 2885.91,1807.95 2898.91,1807.95 ; 2885.91,1808.95 2898.91,1808.95 ; 2886.91,1663.95 2994.91,1663.95 ; 2886.91,1664.95 2993.91,1664.95 ; 2886.91,1747.95 2888.91,1747.95 ; 2886.91,1748.95 2892.91,1748.95 ; 2886.91,1754.95 2888.91,1754.95 ; 2886.91,1755.95 2888.91,1755.95 ; 2886.91,1756.95 2888.91,1756.95 ; 2886.91,1757.95 2889.91,1757.95 ; 2886.91,1758.95 2889.91,1758.95 ; 2886.91,1763.95 2889.91,1763.95 ; 2886.91,1764.95 2888.91,1764.95 ; 2886.91,1777.95 2903.91,1777.95 ; 2886.91,1778.95 2902.91,1778.95 ; 2886.91,1854.95 2994.91,1854.95 ; 2887.91,1665.95 2993.91,1665.95 ; 2887.91,1749.95 2891.91,1749.95 ; 2887.91,1750.95 2890.91,1750.95 ; 2887.91,1751.95 2890.91,1751.95 ; 2887.91,1752.95 2910.91,1752.95 ; 2887.91,1753.95 2919.91,1753.95 ; 2887.91,1759.95 2889.91,1759.95 ; 2887.91,1760.95 2889.91,1760.95 ; 2887.91,1761.95 2889.91,1761.95 ; 2887.91,1762.95 2889.91,1762.95 ; 2887.91,1775.95 2906.91,1775.95 ; 2887.91,1776.95 2905.91,1776.95 ; 2887.91,1853.95 2990.91,1853.95 ; 2888.91,1666.95 2992.91,1666.95 ; 2888.91,1667.95 2992.91,1667.95 ; 2888.91,1774.95 2908.91,1774.95 ; 2889.91,1668.95 2991.91,1668.95 ; 2889.91,1747.95 2892.91,1747.95 ; 2889.91,1772.95 2911.91,1772.95 ; 2889.91,1773.95 2910.91,1773.95 ; 2889.91,1851.95 2982.91,1851.95 ; 2889.91,1852.95 2986.91,1852.95 ; 2890.91,1669.95 2991.91,1669.95 ; 2890.91,1771.95 2913.91,1771.95 ; 2890.91,1850.95 2978.91,1850.95 ; 2891.91,1670.95 2990.91,1670.95 ; 2891.91,1745.95 2893.91,1745.95 ; 2891.91,1746.95 2893.91,1746.95 ; 2891.91,1769.95 2915.91,1769.95 ; 2891.91,1770.95 2914.91,1770.95 ; 2891.91,1849.95 2974.91,1849.95 ; 2892.91,1671.95 2984.91,1671.95 ; 2892.91,1672.95 2984.91,1672.95 ; 2892.91,1744.95 2894.91,1744.95 ; 2892.91,1754.95 2929.91,1754.95 ; 2892.91,1767.95 2917.91,1767.95 ; 2892.91,1768.95 2916.91,1768.95 ; 2892.91,1847.95 2968.91,1847.95 ; 2892.91,1848.95 2971.91,1848.95 ; 2893.91,1673.95 2984.91,1673.95 ; 2893.91,1742.95 2895.91,1742.95 ; 2893.91,1743.95 2895.91,1743.95 ; 2893.91,1755.95 2926.91,1755.95 ; 2893.91,1765.95 2918.91,1765.95 ; 2893.91,1766.95 2917.91,1766.95 ; 2893.91,1846.95 2964.91,1846.95 ; 2894.91,1674.95 2984.91,1674.95 ; 2894.91,1741.95 2896.91,1741.95 ; 2894.91,1756.95 2924.91,1756.95 ; 2894.91,1757.95 2923.91,1757.95 ; 2894.91,1758.95 2922.91,1758.95 ; 2894.91,1759.95 2921.91,1759.95 ; 2894.91,1760.95 2921.91,1760.95 ; 2894.91,1761.95 2920.91,1761.95 ; 2894.91,1762.95 2920.91,1762.95 ; 2894.91,1763.95 2919.91,1763.95 ; 2894.91,1764.95 2919.91,1764.95 ; 2894.91,1844.95 2959.91,1844.95 ; 2894.91,1845.95 2961.91,1845.95 ; 2895.91,1675.95 2983.91,1675.95 ; 2895.91,1739.95 2897.91,1739.95 ; 2895.91,1740.95 2897.91,1740.95 ; 2895.91,1788.95 2897.91,1788.95 ; 2895.91,1843.95 2956.91,1843.95 ; 2896.91,1676.95 2983.91,1676.95 ; 2896.91,1737.95 2898.91,1737.95 ; 2896.91,1738.95 2898.91,1738.95 ; 2896.91,1841.95 2952.91,1841.95 ; 2896.91,1842.95 2954.91,1842.95 ; 2897.91,1677.95 2983.91,1677.95 ; 2897.91,1735.95 2899.91,1735.95 ; 2897.91,1736.95 2899.91,1736.95 ; 2897.91,1787.95 2898.91,1787.95 ; 2897.91,1793.95 2899.91,1793.95 ; 2897.91,1839.95 2948.91,1839.95 ; 2897.91,1840.95 2950.91,1840.95 ; 2898.91,1678.95 2982.91,1678.95 ; 2898.91,1733.95 2900.91,1733.95 ; 2898.91,1734.95 2900.91,1734.95 ; 2898.91,1786.95 2900.91,1786.95 ; 2898.91,1837.95 2947.91,1837.95 ; 2898.91,1838.95 2947.91,1838.95 ; 2899.91,1679.95 2982.91,1679.95 ; 2899.91,1731.95 2901.91,1731.95 ; 2899.91,1732.95 2901.91,1732.95 ; 2899.91,1785.95 2901.91,1785.95 ; 2899.91,1792.95 2900.91,1792.95 ; 2899.91,1835.95 2942.91,1835.95 ; 2899.91,1836.95 2949.91,1836.95 ; 2900.91,1680.95 2981.91,1680.95 ; 2900.91,1728.95 2903.91,1728.95 ; 2900.91,1729.95 2902.91,1729.95 ; 2900.91,1730.95 2902.91,1730.95 ; 2900.91,1832.95 2940.91,1832.95 ; 2900.91,1833.95 2940.91,1833.95 ; 2900.91,1834.95 2941.91,1834.95 ; 2901.91,1681.95 2980.91,1681.95 ; 2901.91,1726.95 2903.91,1726.95 ; 2901.91,1727.95 2903.91,1727.95 ; 2901.91,1784.95 2903.91,1784.95 ; 2901.91,1829.95 2936.91,1829.95 ; 2901.91,1830.95 2937.91,1830.95 ; 2901.91,1831.95 2940.91,1831.95 ; 2902.91,1682.95 2980.91,1682.95 ; 2902.91,1724.95 2904.91,1724.95 ; 2902.91,1725.95 2904.91,1725.95 ; 2902.91,1783.95 2904.91,1783.95 ; 2903.91,1683.95 2979.91,1683.95 ; 2903.91,1702.95 2904.91,1702.95 ; 2903.91,1721.95 2905.91,1721.95 ; 2903.91,1722.95 2905.91,1722.95 ; 2903.91,1723.95 2905.91,1723.95 ; 2904.91,1684.95 2978.91,1684.95 ; 2904.91,1703.95 2905.91,1703.95 ; 2904.91,1704.95 2907.91,1704.95 ; 2904.91,1705.95 2908.91,1705.95 ; 2904.91,1706.95 2910.91,1706.95 ; 2904.91,1707.95 2911.91,1707.95 ; 2904.91,1717.95 2906.91,1717.95 ; 2904.91,1718.95 2906.91,1718.95 ; 2904.91,1719.95 2906.91,1719.95 ; 2904.91,1720.95 2906.91,1720.95 ; 2904.91,1782.95 2905.91,1782.95 ; 2904.91,1828.95 2934.91,1828.95 ; 2905.91,1685.95 2977.91,1685.95 ; 2905.91,1686.95 2977.91,1686.95 ; 2905.91,1708.95 2913.91,1708.95 ; 2905.91,1709.95 2907.91,1709.95 ; 2905.91,1710.95 2907.91,1710.95 ; 2905.91,1711.95 2907.91,1711.95 ; 2905.91,1712.95 2907.91,1712.95 ; 2905.91,1713.95 2906.91,1713.95 ; 2905.91,1714.95 2906.91,1714.95 ; 2905.91,1715.95 2906.91,1715.95 ; 2905.91,1716.95 2906.91,1716.95 ; 2905.91,1781.95 2907.91,1781.95 ; 2906.91,1687.95 2976.91,1687.95 ; 2906.91,1688.95 2975.91,1688.95 ; 2906.91,1780.95 2908.91,1780.95 ; 2906.91,1827.95 2933.91,1827.95 ; 2907.91,1689.95 2974.91,1689.95 ; 2908.91,1690.95 2973.91,1690.95 ; 2908.91,1779.95 2909.91,1779.95 ; 2908.91,1826.95 2932.91,1826.95 ; 2909.91,1691.95 2971.91,1691.95 ; 2909.91,1825.95 2931.91,1825.95 ; 2910.91,1692.95 2970.91,1692.95 ; 2911.91,1693.95 2969.91,1693.95 ; 2911.91,1709.95 2915.91,1709.95 ; 2911.91,1824.95 2930.91,1824.95 ; 2912.91,1823.95 2928.91,1823.95 ; 2913.91,1694.95 2968.91,1694.95 ; 2913.91,1710.95 2918.91,1710.95 ; 2914.91,1822.95 2927.91,1822.95 ; 2915.91,1695.95 2934.91,1695.95 ; 2915.91,1711.95 2921.91,1711.95 ; 2915.91,1821.95 2925.91,1821.95 ; 2916.91,1820.95 2920.91,1820.95 ; 2918.91,1696.95 2933.91,1696.95 ; 2918.91,1712.95 2924.91,1712.95 ; 2918.91,1819.95 2920.91,1819.95 ; 2919.91,1818.95 2921.91,1818.95 ; 2920.91,1817.95 2922.91,1817.95 ; 2921.91,1697.95 2931.91,1697.95 ; 2921.91,1713.95 2928.91,1713.95 ; 2921.91,1816.95 2923.91,1816.95 ; 2922.91,1701.95 2926.91,1701.95 ; 2922.91,1702.95 2925.91,1702.95 ; 2922.91,1703.95 2925.91,1703.95 ; 2922.91,1753.95 2932.91,1753.95 ; 2922.91,1815.95 2924.91,1815.95 ; 2923.91,1698.95 2930.91,1698.95 ; 2923.91,1704.95 2925.91,1704.95 ; 2923.91,1705.95 2926.91,1705.95 ; 2923.91,1814.95 2940.91,1814.95 ; 2924.91,1700.95 2928.91,1700.95 ; 2924.91,1706.95 2927.91,1706.95 ; 2924.91,1714.95 2938.91,1714.95 ; 2924.91,1813.95 2940.91,1813.95 ; 2925.91,1699.95 2929.91,1699.95 ; 2925.91,1707.95 2928.91,1707.95 ; 2925.91,1812.95 2940.91,1812.95 ; 2926.91,1708.95 2929.91,1708.95 ; 2926.91,1752.95 2934.91,1752.95 ; 2926.91,1810.95 2940.91,1810.95 ; 2926.91,1811.95 2940.91,1811.95 ; 2926.91,1815.95 2940.91,1815.95 ; 2927.91,1709.95 2930.91,1709.95 ; 2927.91,1715.95 2939.91,1715.95 ; 2927.91,1809.95 2940.91,1809.95 ; 2928.91,1808.95 2940.91,1808.95 ; 2928.91,1816.95 2939.91,1816.95 ; 2929.91,1710.95 2931.91,1710.95 ; 2929.91,1751.95 2937.91,1751.95 ; 2929.91,1806.95 2940.91,1806.95 ; 2929.91,1807.95 2940.91,1807.95 ; 2929.91,1817.95 2939.91,1817.95 ; 2930.91,1711.95 2933.91,1711.95 ; 2930.91,1805.95 2940.91,1805.95 ; 2931.91,1712.95 2934.91,1712.95 ; 2931.91,1713.95 2936.91,1713.95 ; 2931.91,1716.95 2941.91,1716.95 ; 2931.91,1804.95 2939.91,1804.95 ; 2931.91,1818.95 2939.91,1818.95 ; 2932.91,1803.95 2939.91,1803.95 ; 2932.91,1819.95 2939.91,1819.95 ; 2933.91,1750.95 2939.91,1750.95 ; 2933.91,1801.95 2938.91,1801.95 ; 2933.91,1802.95 2939.91,1802.95 ; 2934.91,1717.95 2943.91,1717.95 ; 2934.91,1800.95 2938.91,1800.95 ; 2934.91,1820.95 2939.91,1820.95 ; 2935.91,1799.95 2938.91,1799.95 ; 2936.91,1749.95 2941.91,1749.95 ; 2936.91,1797.95 2937.91,1797.95 ; 2936.91,1798.95 2938.91,1798.95 ; 2936.91,1821.95 2939.91,1821.95 ; 2937.91,1695.95 2966.91,1695.95 ; 2937.91,1822.95 2939.91,1822.95 ; 2938.91,1718.95 2945.91,1718.95 ; 2938.91,1823.95 2939.91,1823.95 ; 2938.91,1824.95 2939.91,1824.95 ; 2938.91,1825.95 2939.91,1825.95 ; 2938.91,1826.95 2939.91,1826.95 ; 2938.91,1827.95 2939.91,1827.95 ; 2938.91,1828.95 2939.91,1828.95 ; 2938.91,1829.95 2939.91,1829.95 ; 2938.91,1830.95 2939.91,1830.95 ; 2939.91,1696.95 2964.91,1696.95 ; 2940.91,1697.95 2963.91,1697.95 ; 2940.91,1748.95 2944.91,1748.95 ; 2941.91,1719.95 2947.91,1719.95 ; 2941.91,1784.95 2955.91,1784.95 ; 2942.91,1698.95 2960.91,1698.95 ; 2942.91,1783.95 2955.91,1783.95 ; 2942.91,1785.95 2955.91,1785.95 ; 2942.91,1786.95 2954.91,1786.95 ; 2942.91,1787.95 2954.91,1787.95 ; 2942.91,1788.95 2954.91,1788.95 ; 2942.91,1789.95 2954.91,1789.95 ; 2942.91,1790.95 2954.91,1790.95 ; 2942.91,1791.95 2953.91,1791.95 ; 2942.91,1792.95 2953.91,1792.95 ; 2942.91,1793.95 2953.91,1793.95 ; 2942.91,1794.95 2953.91,1794.95 ; 2943.91,1747.95 2947.91,1747.95 ; 2943.91,1782.95 2955.91,1782.95 ; 2943.91,1795.95 2953.91,1795.95 ; 2943.91,1796.95 2952.91,1796.95 ; 2943.91,1797.95 2952.91,1797.95 ; 2943.91,1798.95 2952.91,1798.95 ; 2943.91,1799.95 2952.91,1799.95 ; 2943.91,1822.95 2952.91,1822.95 ; 2943.91,1823.95 2952.91,1823.95 ; 2943.91,1824.95 2953.91,1824.95 ; 2943.91,1825.95 2952.91,1825.95 ; 2943.91,1826.95 2951.91,1826.95 ; 2943.91,1827.95 2950.91,1827.95 ; 2943.91,1828.95 2949.91,1828.95 ; 2944.91,1699.95 2957.91,1699.95 ; 2944.91,1720.95 2948.91,1720.95 ; 2944.91,1781.95 2955.91,1781.95 ; 2944.91,1800.95 2951.91,1800.95 ; 2944.91,1801.95 2951.91,1801.95 ; 2944.91,1802.95 2951.91,1802.95 ; 2944.91,1803.95 2951.91,1803.95 ; 2944.91,1804.95 2951.91,1804.95 ; 2944.91,1805.95 2951.91,1805.95 ; 2944.91,1806.95 2951.91,1806.95 ; 2944.91,1812.95 2952.91,1812.95 ; 2944.91,1813.95 2952.91,1813.95 ; 2944.91,1814.95 2952.91,1814.95 ; 2944.91,1815.95 2952.91,1815.95 ; 2944.91,1816.95 2952.91,1816.95 ; 2944.91,1817.95 2952.91,1817.95 ; 2944.91,1818.95 2952.91,1818.95 ; 2944.91,1819.95 2952.91,1819.95 ; 2944.91,1820.95 2952.91,1820.95 ; 2944.91,1821.95 2952.91,1821.95 ; 2944.91,1829.95 2948.91,1829.95 ; 2944.91,1830.95 2947.91,1830.95 ; 2945.91,1780.95 2955.91,1780.95 ; 2945.91,1807.95 2951.91,1807.95 ; 2945.91,1808.95 2951.91,1808.95 ; 2945.91,1809.95 2951.91,1809.95 ; 2945.91,1810.95 2952.91,1810.95 ; 2945.91,1811.95 2952.91,1811.95 ; 2945.91,1831.95 2946.91,1831.95 ; 2946.91,1779.95 2955.91,1779.95 ; 2947.91,1721.95 2950.91,1721.95 ; 2947.91,1746.95 2949.91,1746.95 ; 2947.91,1778.95 2955.91,1778.95 ; 2948.91,1777.95 2955.91,1777.95 ; 2949.91,1776.95 2955.91,1776.95 ; 2949.91,1835.95 2951.91,1835.95 ; 2950.91,1745.95 2952.91,1745.95 ; 2950.91,1775.95 2955.91,1775.95 ; 2951.91,1774.95 2955.91,1774.95 ; 2951.91,1834.95 2975.91,1834.95 ; 2952.91,1772.95 2956.91,1772.95 ; 2952.91,1773.95 2956.91,1773.95 ; 2953.91,1771.95 2956.91,1771.95 ; 2953.91,1825.95 2955.91,1825.95 ; 2953.91,1828.95 2954.91,1828.95 ; 2953.91,1833.95 2972.91,1833.95 ; 2953.91,1835.95 2978.91,1835.95 ; 2954.91,1769.95 2957.91,1769.95 ; 2954.91,1770.95 2956.91,1770.95 ; 2954.91,1826.95 2960.91,1826.95 ; 2954.91,1827.95 2956.91,1827.95 ; 2954.91,1832.95 2969.91,1832.95 ; 2955.91,1767.95 2957.91,1767.95 ; 2955.91,1768.95 2957.91,1768.95 ; 2955.91,1831.95 2967.91,1831.95 ; 2955.91,1836.95 2981.91,1836.95 ; 2956.91,1765.95 2957.91,1765.95 ; 2956.91,1766.95 2957.91,1766.95 ; 2956.91,1802.95 3340.91,1802.95 ; 2956.91,1803.95 3340.91,1803.95 ; 2956.91,1804.95 3340.91,1804.95 ; 2956.91,1805.95 3340.91,1805.95 ; 2956.91,1806.95 3340.91,1806.95 ; 2956.91,1807.95 3340.91,1807.95 ; 2956.91,1830.95 2965.91,1830.95 ; 2957.91,1764.95 2958.91,1764.95 ; 2957.91,1798.95 3340.91,1798.95 ; 2957.91,1799.95 3340.91,1799.95 ; 2957.91,1800.95 3340.91,1800.95 ; 2957.91,1801.95 3340.91,1801.95 ; 2957.91,1808.95 3340.91,1808.95 ; 2957.91,1809.95 3340.91,1809.95 ; 2957.91,1810.95 3340.91,1810.95 ; 2957.91,1811.95 3340.91,1811.95 ; 2957.91,1829.95 2963.91,1829.95 ; 2957.91,1837.95 2984.91,1837.95 ; 2958.91,1795.95 2970.91,1795.95 ; 2958.91,1796.95 2979.91,1796.95 ; 2958.91,1797.95 3340.91,1797.95 ; 2958.91,1812.95 3340.91,1812.95 ; 2958.91,1813.95 3340.91,1813.95 ; 2958.91,1814.95 3340.91,1814.95 ; 2958.91,1815.95 3340.91,1815.95 ; 2958.91,1816.95 3340.91,1816.95 ; 2958.91,1817.95 3340.91,1817.95 ; 2958.91,1818.95 3340.91,1818.95 ; 2958.91,1819.95 3340.91,1819.95 ; 2958.91,1820.95 3340.91,1820.95 ; 2958.91,1821.95 3340.91,1821.95 ; 2958.91,1822.95 3340.91,1822.95 ; 2958.91,1823.95 2960.91,1823.95 ; 2958.91,1824.95 2960.91,1824.95 ; 2958.91,1825.95 2960.91,1825.95 ; 2958.91,1827.95 2960.91,1827.95 ; 2958.91,1828.95 2961.91,1828.95 ; 2959.91,1791.95 2962.91,1791.95 ; 2959.91,1792.95 2961.91,1792.95 ; 2959.91,1793.95 2961.91,1793.95 ; 2959.91,1794.95 2961.91,1794.95 ; 2959.91,1838.95 2988.91,1838.95 ; 2960.91,1784.95 3340.91,1784.95 ; 2960.91,1785.95 3028.91,1785.95 ; 2960.91,1786.95 3024.91,1786.95 ; 2960.91,1787.95 3021.91,1787.95 ; 2960.91,1788.95 3018.91,1788.95 ; 2960.91,1789.95 2962.91,1789.95 ; 2960.91,1790.95 2962.91,1790.95 ; 2961.91,1776.95 3340.91,1776.95 ; 2961.91,1777.95 3340.91,1777.95 ; 2961.91,1778.95 3340.91,1778.95 ; 2961.91,1779.95 3340.91,1779.95 ; 2961.91,1780.95 3340.91,1780.95 ; 2961.91,1781.95 3340.91,1781.95 ; 2961.91,1782.95 3340.91,1782.95 ; 2961.91,1783.95 3340.91,1783.95 ; 2961.91,1839.95 2991.91,1839.95 ; 2962.91,1769.95 3033.91,1769.95 ; 2962.91,1770.95 3033.91,1770.95 ; 2962.91,1771.95 3033.91,1771.95 ; 2962.91,1772.95 3340.91,1772.95 ; 2962.91,1773.95 3340.91,1773.95 ; 2962.91,1774.95 3340.91,1774.95 ; 2962.91,1775.95 3340.91,1775.95 ; 2963.91,1761.95 3033.91,1761.95 ; 2963.91,1762.95 3033.91,1762.95 ; 2963.91,1763.95 3033.91,1763.95 ; 2963.91,1764.95 3033.91,1764.95 ; 2963.91,1765.95 3033.91,1765.95 ; 2963.91,1766.95 3033.91,1766.95 ; 2963.91,1767.95 3033.91,1767.95 ; 2963.91,1768.95 3033.91,1768.95 ; 2964.91,1756.95 2979.91,1756.95 ; 2964.91,1757.95 2979.91,1757.95 ; 2964.91,1758.95 3033.91,1758.95 ; 2964.91,1759.95 3033.91,1759.95 ; 2964.91,1760.95 3033.91,1760.95 ; 2964.91,1823.95 3340.91,1823.95 ; 2964.91,1840.95 2995.91,1840.95 ; 2965.91,1754.95 2979.91,1754.95 ; 2965.91,1755.95 2979.91,1755.95 ; 2965.91,1789.95 3014.91,1789.95 ; 2966.91,1753.95 2979.91,1753.95 ; 2966.91,1824.95 3340.91,1824.95 ; 2967.91,1752.95 2979.91,1752.95 ; 2967.91,1841.95 2999.91,1841.95 ; 2969.91,1751.95 2979.91,1751.95 ; 2969.91,1825.95 3340.91,1825.95 ; 2969.91,1842.95 3002.91,1842.95 ; 2971.91,1750.95 2979.91,1750.95 ; 2971.91,1826.95 3340.91,1826.95 ; 2972.91,1843.95 3006.91,1843.95 ; 2974.91,1749.95 2979.91,1749.95 ; 2974.91,1827.95 3340.91,1827.95 ; 2975.91,1790.95 3008.91,1790.95 ; 2975.91,1844.95 3010.91,1844.95 ; 2976.91,1828.95 3340.91,1828.95 ; 2979.91,1829.95 3340.91,1829.95 ; 2979.91,1845.95 3014.91,1845.95 ; 2981.91,1757.95 3033.91,1757.95 ; 2982.91,1756.95 3033.91,1756.95 ; 2982.91,1830.95 3340.91,1830.95 ; 2982.91,1846.95 3018.91,1846.95 ; 2983.91,1755.95 3033.91,1755.95 ; 2984.91,1754.95 2998.91,1754.95 ; 2985.91,1753.95 2997.91,1753.95 ; 2985.91,1791.95 3000.91,1791.95 ; 2985.91,1831.95 3340.91,1831.95 ; 2986.91,1671.95 2989.91,1671.95 ; 2986.91,1751.95 2996.91,1751.95 ; 2986.91,1752.95 2997.91,1752.95 ; 2986.91,1847.95 3023.91,1847.95 ; 2988.91,1750.95 2994.91,1750.95 ; 2988.91,1832.95 3340.91,1832.95 ; 2989.91,1749.95 2990.91,1749.95 ; 2989.91,1848.95 3027.91,1848.95 ; 2991.91,1709.95 3033.91,1709.95 ; 2991.91,1710.95 3033.91,1710.95 ; 2991.91,1711.95 3033.91,1711.95 ; 2991.91,1712.95 3033.91,1712.95 ; 2991.91,1713.95 3033.91,1713.95 ; 2991.91,1714.95 3033.91,1714.95 ; 2991.91,1715.95 3033.91,1715.95 ; 2991.91,1716.95 3033.91,1716.95 ; 2991.91,1717.95 3033.91,1717.95 ; 2991.91,1833.95 3340.91,1833.95 ; 2992.91,1707.95 3033.91,1707.95 ; 2992.91,1708.95 3033.91,1708.95 ; 2992.91,1718.95 3033.91,1718.95 ; 2992.91,1719.95 3013.91,1719.95 ; 2992.91,1720.95 3012.91,1720.95 ; 2993.91,1705.95 3033.91,1705.95 ; 2993.91,1706.95 3033.91,1706.95 ; 2993.91,1721.95 3012.91,1721.95 ; 2993.91,1742.95 2997.91,1742.95 ; 2993.91,1743.95 2995.91,1743.95 ; 2993.91,1744.95 2994.91,1744.95 ; 2993.91,1849.95 3032.91,1849.95 ; 2994.91,1703.95 3033.91,1703.95 ; 2994.91,1704.95 3033.91,1704.95 ; 2994.91,1722.95 3012.91,1722.95 ; 2994.91,1723.95 3012.91,1723.95 ; 2995.91,1702.95 3033.91,1702.95 ; 2995.91,1724.95 3012.91,1724.95 ; 2995.91,1796.95 3340.91,1796.95 ; 2995.91,1834.95 3340.91,1834.95 ; 2996.91,1700.95 3033.91,1700.95 ; 2996.91,1701.95 3033.91,1701.95 ; 2997.91,1698.95 3007.91,1698.95 ; 2997.91,1699.95 3033.91,1699.95 ; 2997.91,1725.95 3012.91,1725.95 ; 2997.91,1850.95 3037.91,1850.95 ; 2998.91,1696.95 3005.91,1696.95 ; 2998.91,1697.95 3006.91,1697.95 ; 2998.91,1835.95 3340.91,1835.95 ; 2999.91,1667.95 3000.91,1667.95 ; 2999.91,1695.95 3005.91,1695.95 ; 2999.91,1726.95 3012.91,1726.95 ; 3000.91,1661.95 3004.91,1661.95 ; 3000.91,1662.95 3003.91,1662.95 ; 3000.91,1663.95 3002.91,1663.95 ; 3000.91,1664.95 3002.91,1664.95 ; 3000.91,1665.95 3001.91,1665.95 ; 3000.91,1694.95 3004.91,1694.95 ; 3001.91,1656.95 3035.91,1656.95 ; 3001.91,1657.95 3035.91,1657.95 ; 3001.91,1658.95 3035.91,1658.95 ; 3001.91,1659.95 3008.91,1659.95 ; 3001.91,1660.95 3006.91,1660.95 ; 3001.91,1836.95 3340.91,1836.95 ; 3001.91,1851.95 3042.91,1851.95 ; 3002.91,1693.95 3004.91,1693.95